# Altium PCB BotInd.PcbDoc
Units mil, origin at the board's own origin, x right, y up, seen from the top; angles counter-clockwise.
Board outline 630 x 950 mil, 2 copper layers (Top Layer, Bottom Layer); 8 components, 6 nets, 19 pads, 0 vias.
Unrouted connection lines stored in the file: 1.
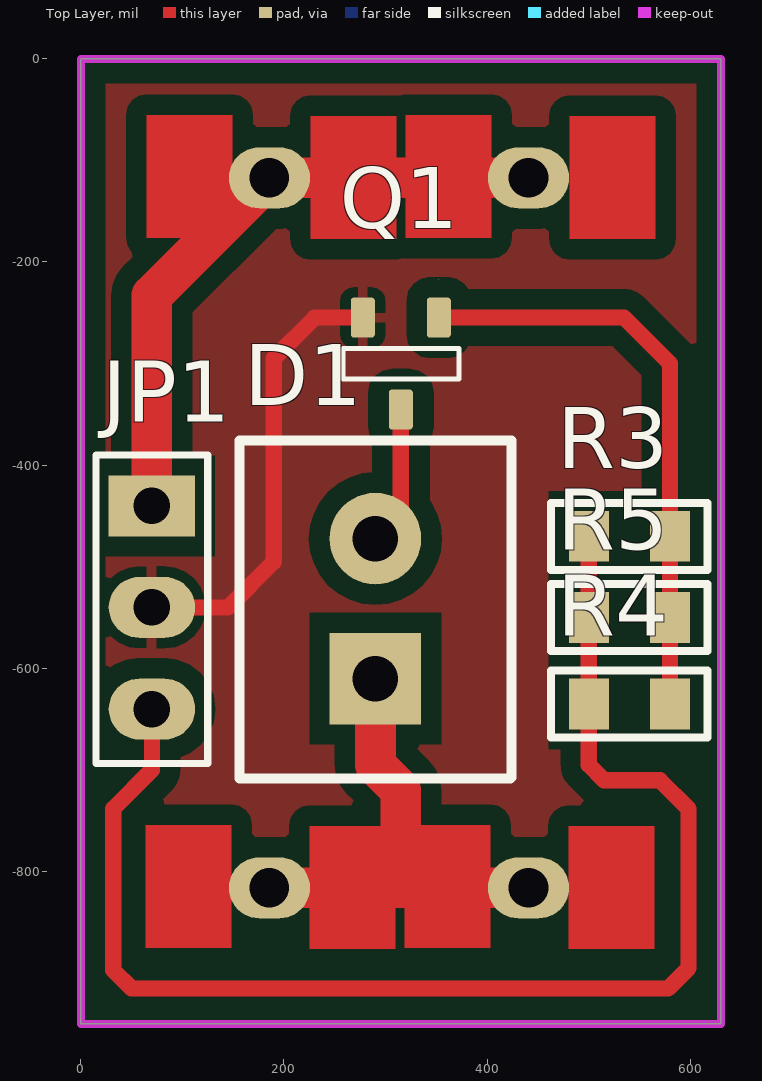
[diagram p0: Top Layer view]
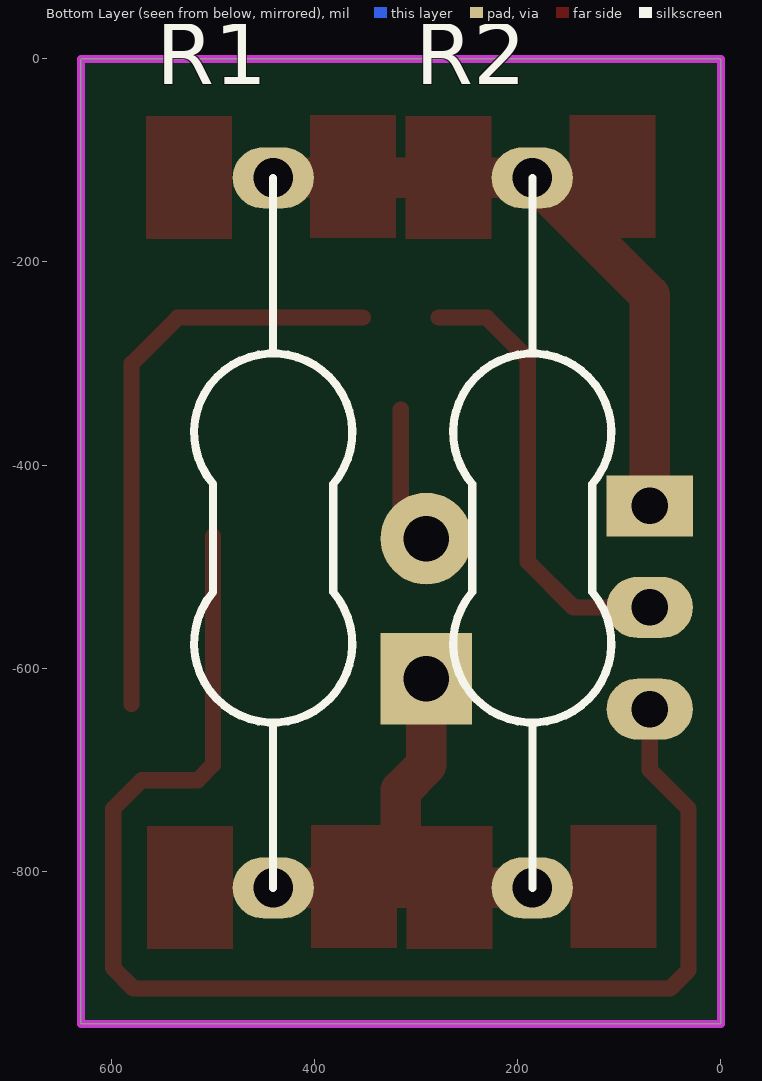
[diagram p1: Bottom Layer view, seen from below]
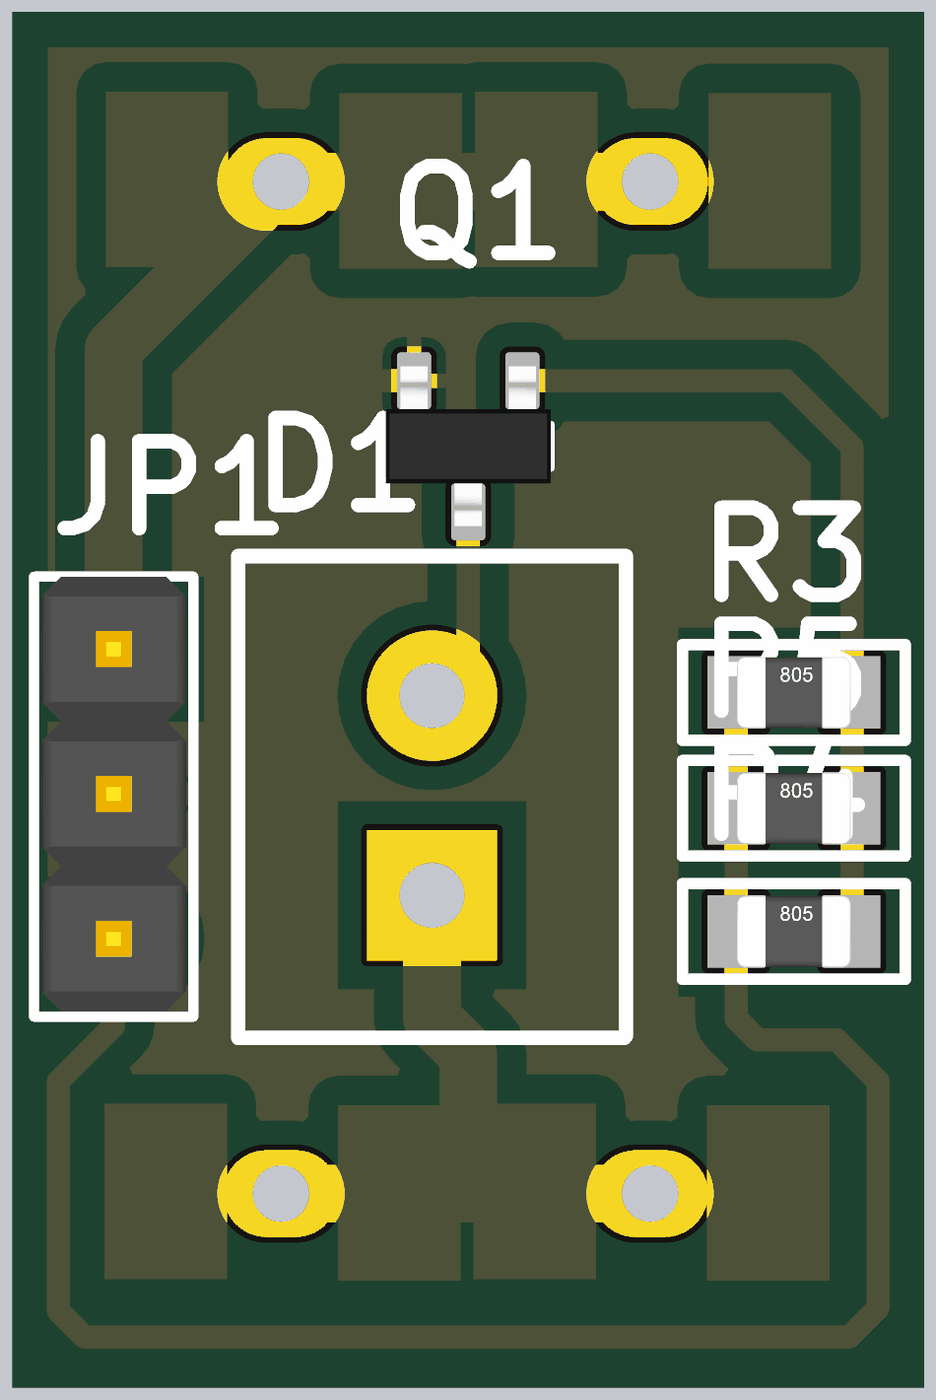
[diagram p2: 3D render of the assembled board from above, using the file's embedded part models]

## Layer stack, top to bottom
Top Solder: solder mask 0.4, Solder Resist, Dk 3.5
Top Layer: signal copper 1.4
Dielectric 1: dielectric 12.6, FR-4, Dk 4.8
Bottom Layer: signal copper 1.4
Bottom Solder: solder mask 0.4, Solder Resist, Dk 3.5

## Board outline
0,-950 0,0 630,0 630,-950

## Design rules (kind name [scope] priority, off if disabled: settings)
Clearance [All] p1: gap=20
PolygonConnect [All] p1: connectstyle=Relief reliefconductorwidth=10 reliefentries=4 polygonreliefangle="90 Angle" airgapwidth=10
RoutingVias [All] p1: holewidth=28 width=50 viastyle="Through Hole" minholewidth=28 minwidth=50 maxholewidth=28 maxwidth=50
SolderMaskExpansion [All] p1: expansion=4
Width [All] p1: maxlimit=40 minlimit=10 preferedwidth=20
29 further rules are at their usual default settings.

## Classes and differential pairs
component class BotInd: D1 JP1 Q1 R2 R3 R4 R5

## Components (designator, comment, footprint, x,y, rotation, side; value= is the part's Value field where it differs from the comment)
D1 "DOMINO" Domino2_350 290,-610 r90 top
JP1 "HEAD3" HEAD3 70,-440 r270 top
Q1 "MMBT222AA" SOT23-3 315,-300 r270 top
R1 "R2W" "R 2W" 440.63,-117.2 r270 bottom
R2 "R2W" "R 2W" 185.63,-117.2 r270 bottom
R3 "0805_R" 0805_R 540,-470 r180 top
R4 "0805_R" 0805_R 540,-635 r180 top
R5 "0805_R" 0805_R 540,-550 r180 top

## Footprints (in the part's own frame and the unit in brackets; to place one, negate y for a bottom-side part, rotate by r counter-clockwise, add the part's x,y. Pads: shape width x height; smd on the part's side, far side on the other; paste and mask are expansions set on the pad)
0805_R [mil] "Chip Resistor; Body 2.0 x 1.3 mm (LxW typ)"
  rect 39.37x50 smd: 1(-40,0) 2(40,0)
  silkscreen extent -77,-33 77,33, body extent -39,-25 39,25, height 31
Domino2_350 [mm]
  rect 2.29x2.29 hole 1.14: 1(0,0)
  round 2.29 hole 1.14: 2(3.5,0)
  silkscreen extent -2.5,-3.4 5.95,3.4
HEAD3 [mil]
  rect 60x85 hole 36: 1(0,0)
  oval 60x85 hole 36: 2(100,0) 3(200,0)
  silkscreen extent -50,-55 254,55, body extent -50,-50 250,50, height 374
"R 2W" [mil]
  oval 60x80 hole 39 mask+4: 1(0,0)
  oval 60x80 hole 39: 2(698.82,0)
  Bottom Layer region: -62.01,121.06 59.05,121.06 59.05,36.42 -62.01,36.42
  Bottom Layer region: -61.02,-40.35 60.04,-40.35 60.04,-125 -61.02,-125
  Bottom Layer region: 637.8,-39.37 758.86,-39.37 758.86,-124.02 637.8,-124.02
  Bottom Layer region: 636.81,122.05 757.87,122.05 757.87,37.4 636.81,37.4
  silkscreen extent 0,-78 699,78
SOT23-3 [mm] "SOT23, 3 pin"
  round 0.5 on Mech15: 0(0,0)
  rrect25% 1x0.6 smd: 1(-1.15,0.95) 2(-1.15,-0.95) 3(1.15,0)
  silkscreen extent -0.38,-1.45 0.38,1.45, body extent -1.4,-1.45 1.4,1.45, height 1.29

## Part data
D1: library part Domino2_small
JP1: "Connector 3"
Q1: "NPN General Purpose Amplifier"
R3 R4 R5: "0805 SMD resistor"

## Nets (pads, with @x,y where several pads share a name; then routed paths per layer and width w, separated by ;. In a path a pad name is that pad's centre, name@x,y a point inside that pad or via, vN(x,y) a via of type N, cw(c..) or ccw(c..) an arc to the next point about the centre after c; other vN are vias at no path point)
CTL: JP1.3 R3.2 R4.2 R5.2 | length 1352.4
  Top Layer w16: JP1.3 70,-700 31.94,-738.06 31.94,-896.94 50,-915 578.06,-915 598.06,-895 598.06,-738.06 570,-710 515,-710 500,-695 R4.2 R5.2 R3.2
GND: JP1.2 Q1.2 | length 442.9
  Top Layer w16: JP1.2 145,-540 190,-495 190,-295 230.28,-254.72 Q1.2
NetD1_1: D1.1 R1.2 R2.2 | length 471.4
  Top Layer w40: R2.2 315,-816.02 ; D1.1 290,-695 315,-720 315,-816.02 ; R1.2 315,-816.02
NetD1_2: D1.2 Q1.3 | length 137.3
  Top Layer w16: D1.2 315,-447.2 Q1.3
NetQ1_1: Q1.1 R3.1 R4.1 R5.1 | length 581.4
  Top Layer w16: Q1.1 534.72,-254.72 580,-300 R3.1 R5.1 R4.1
VCC: JP1.1 R1.1 R2.1 | length 373.6
  Top Layer w40: JP1.1 70,-232.83 R2.1 185.63,-119.65 R2.1@185.98,-120
pads on no net: Q1.0
copper on no net: | length 255
  Top Layer w40: 185.63,-117.2 440.63,-117.2

## Polygon pours and split planes (outlines as drawn)
GND on Top Layer "top" (solid, pour order 2): 9.37,-9.13 619.37,-9.13 619.37,-939.13 14.37,-939.13 9.37,-934.13

## Keep-outs
Keep-Out Layer:
  lines w7.87: 0,-950 630,-950 630,0 610,0 0,0 0,-950